# Altium PCB TMS320VC5509A.PcbDoc
Units mil, origin at the board's own origin, x right, y up, seen from the top; angles counter-clockwise.
Board outline 2940 x 2381 mil, 2 copper layers (Top Layer, Bottom Layer); 76 components, 113 nets, 425 pads, 0 vias.
Unrouted connection lines stored in the file: 218.
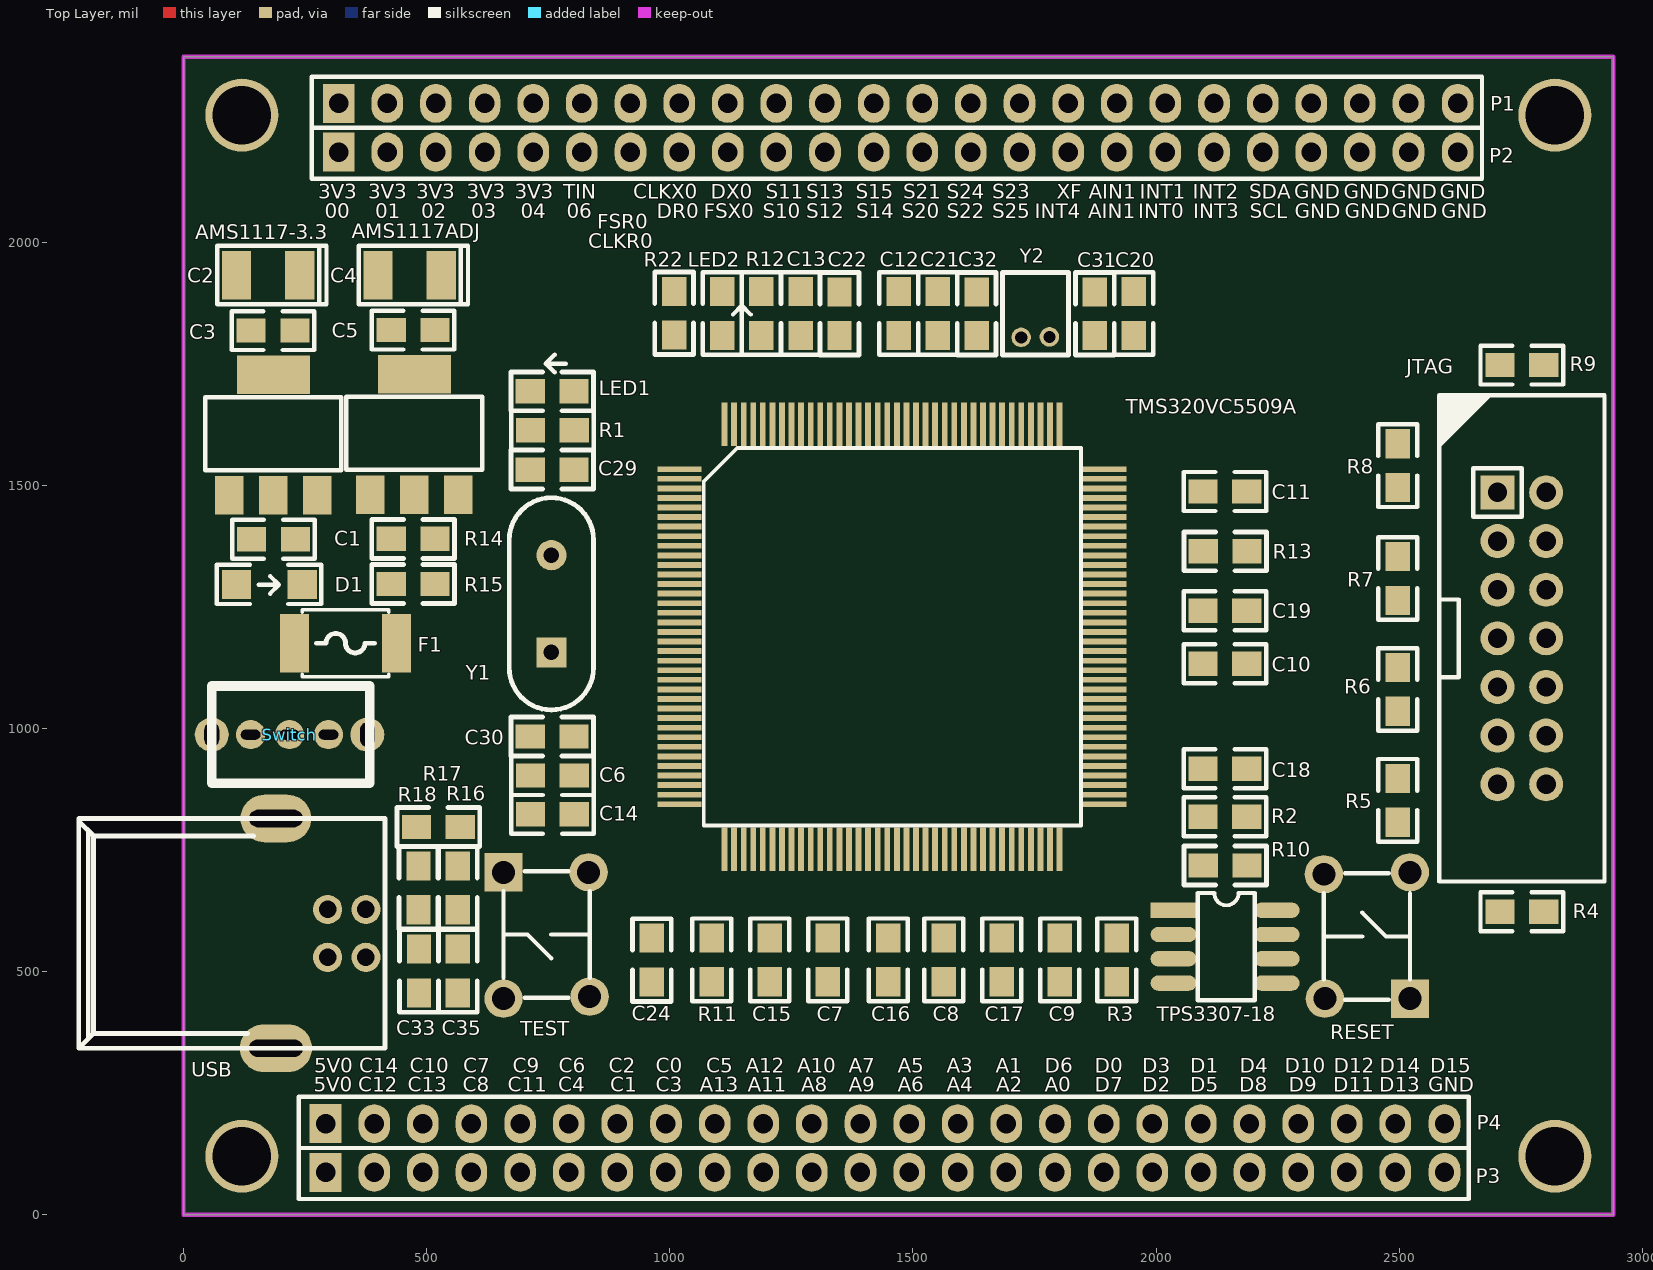
[diagram p0: Top Layer view]
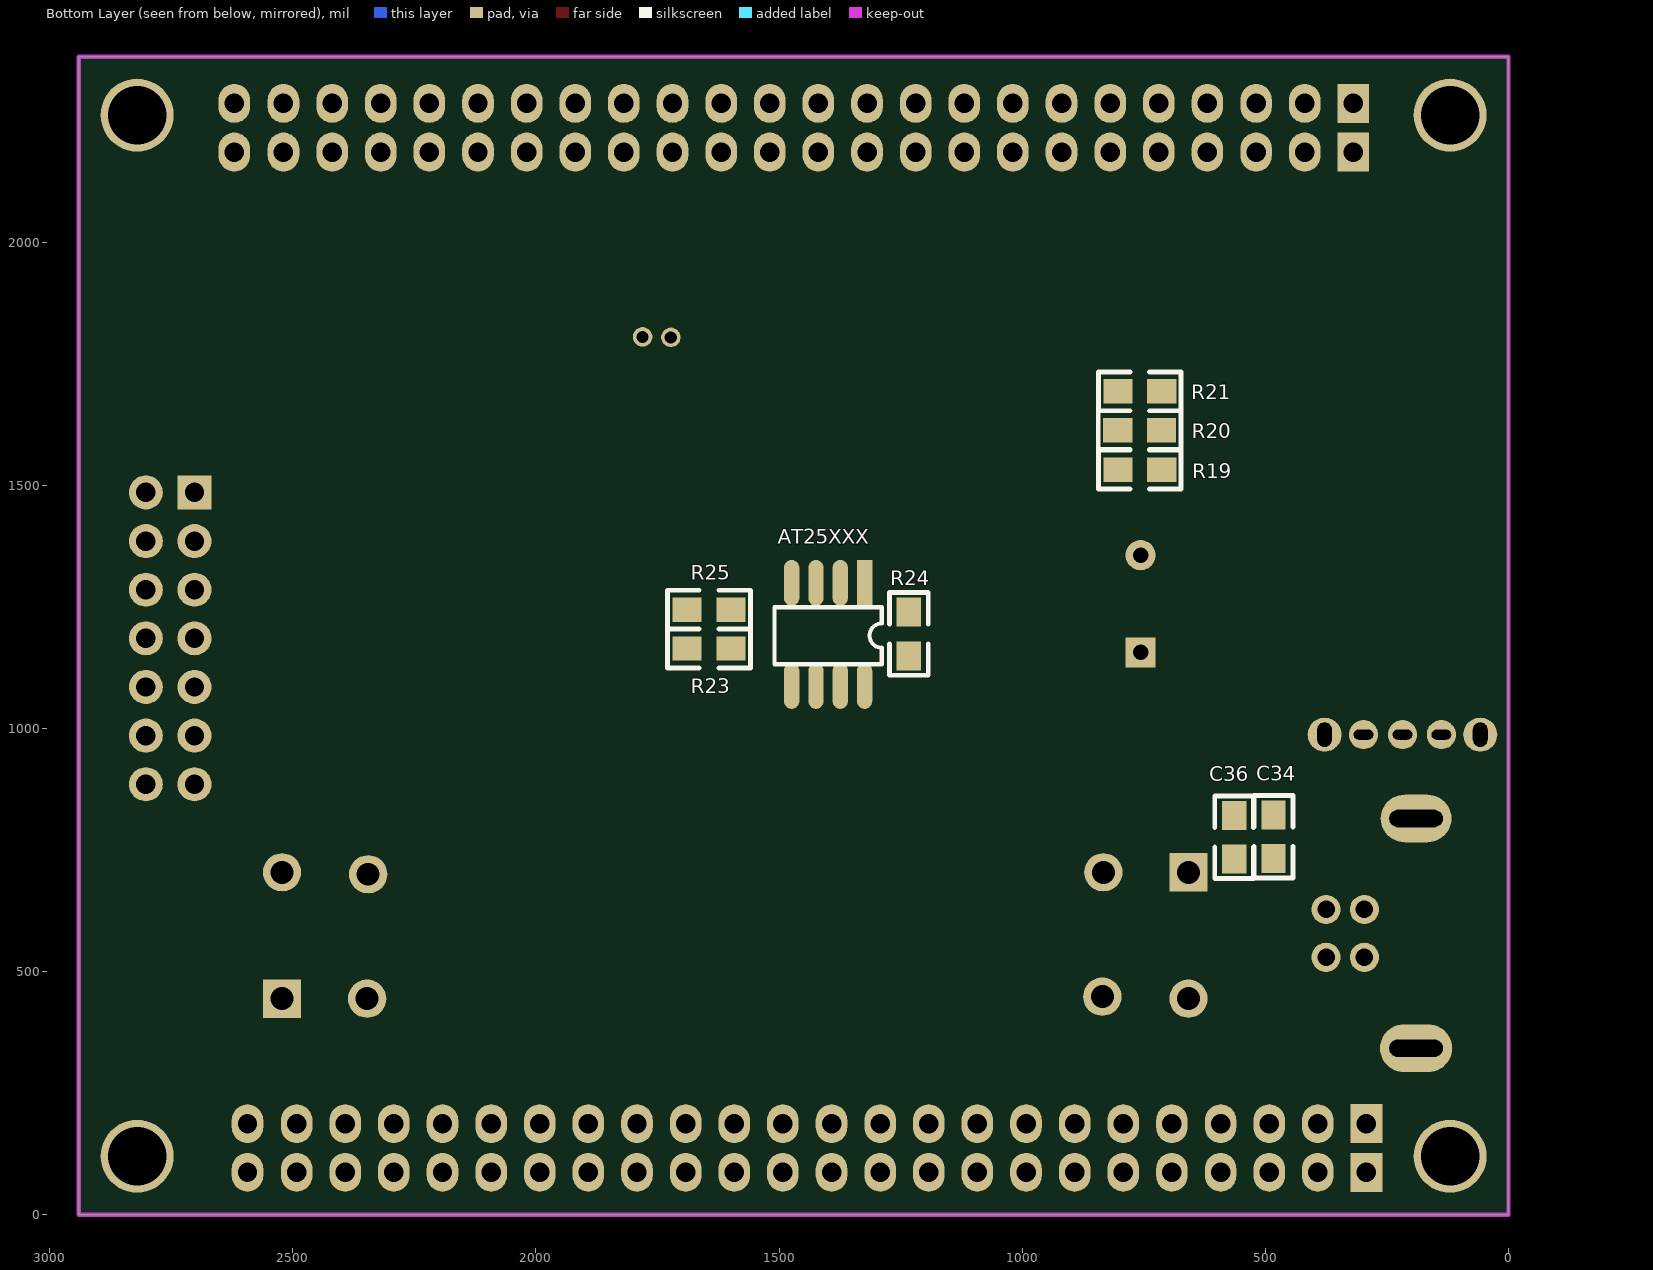
[diagram p1: Bottom Layer view, seen from below]

## Layer stack, top to bottom
Top Layer: signal copper 1.4
Dielectric: dielectric 12.6, FR-4, Dk 4.8
Bottom Layer: signal copper 1.4

## Board outline
0,2381 0,0 2940,0 2940,2381

## Design rules (kind name [scope] priority, off if disabled: settings)
Clearance [All] p1: gap=10
HoleSize [All] p1: absolutevalues=TRUE maxlimit=1000 minlimit=1 maxpercent=80.000 minpercent=20.000
HoleToHoleClearance [All] p1: gap=0 allowstackedmicrovias=TRUE
MinimumSolderMaskSliver [All] p1: minsoldermaskwidth=0
PolygonConnect [All] p1: connectstyle=Direct reliefconductorwidth=30 reliefentries=4 polygonreliefangle="90 Angle"
RoutingVias [All] p1: holewidth=12 width=22 viastyle="Through Hole" minholewidth=12 minwidth=22 maxholewidth=50 maxwidth=100
SilkToSilkClearance [All] p1: silktosilkclearance=0
SilkscreenOverComponentPads [All] p1: minsilkscreentomaskgap=0
SolderMaskExpansion [All] p1: expansion=1
TestPointUsage [All] p1: valid=0 allowmultiple=FALSE
Testpoint [All] p1: side=15 testpointundercomponent=TRUE minsize=40 maxsize=100 preferedsize=60 minholesize=0 maxholesize=40 preferedholesize=32 testpointgrid=1 style=1023 order=0-112345678
Width [All] p1: maxlimit=100 minlimit=10 preferedwidth=10
19 further rules are at their usual default settings.

## Components (designator, comment, footprint, x,y, rotation, side; value= is the part's Value field where it differs from the comment)
AMS1117-3.3 "1117" SOT-223 64,1454 r0 top
AMS1117ADJ "1117" SOT-223 354,1455 r0 top (schematic designator AMS1117-1.8)
AT25XXX "" SOP8 1324,1299 r0 bottom locked (schematic designator TPS3307-18)
C1 "104" 0805 230,1389 r180 top
C2 "10uf" CE3528 239,1932 r180 top
C3 "104" 0805 229,1818 r180 top
C4 "10uF" CE3528 530,1932 r180 top
C5 "104" 0805 517,1819 r180 top
C6 "104" 0805 803.5,903 r180 top
C7 "104" 0805 1324.67,569 r270 top
C8 "104" 0805 1563.33,569 r270 top (schematic designator C9)
C9 "104" 0805 1802,569 r270 top (schematic designator C10)
C10 "104" 0805 2096.5,1133 r0 top (schematic designator C12)
C11 "104" 0805 2096.5,1487 r0 top (schematic designator C13)
C12 "104" 0805 1471,1808 r90 top (schematic designator C15)
C13 "104" 0805 1269,1808 r90 top (schematic designator C16)
C14 "104" 0805 803.5,823 r180 top (schematic designator C18)
C15 "104" 0805 1205.33,569 r270 top (schematic designator C19)
C16 "104" 0805 1449,569 r270 top (schematic designator C20)
C17 "104" 0805 1682.67,569 r270 top (schematic designator C22)
C18 "104" 0805 2096.5,917 r0 top (schematic designator C23)
C19 "104" 0805 2096.5,1242 r0 top (schematic designator C25)
C20 "104" 0805 1954,1808 r90 top (schematic designator C26)
C21 "104" 0805 1551,1898 r270 top (schematic designator C27)
C22 "104" 0805 1349,1897.5 r270 top
C24 "104" 0805 963,568.5 r270 top (schematic designator C88)
C29 "30pF" 0805 713,1532 r0 top
C30 "30pF" 0805 713,983 r0 top
C31 "30pF" 0805 1874,1897.5 r270 top
C32 "30pF" 0805 1631,1897.5 r270 top
C33 "30pF" 0805 484,456 r90 top
C34 "30pF" 0805 483,732 r90 bottom
C35 "30pF" 0805 564,456 r90 top
C36 "30pF" 0805 564,731 r90 bottom
D1 "7.5V" 1206 109,1296 r0 top
F1 "0.5A" F4532 438,1175 r180 top
JTAG "Header 7X2" IDC14A 2702,1485 r270 top locked
LED1 "LED2" 0805 803,1693 r180 top
LED2 "LED2" 0805 1108,1808 r90 top
P1 "SIP24" SIP24 320,2287 r90 top locked
P2 "SIP24" SIP24 320,2187 r90 top locked
P3 "SIP24" SIP24 293,89 r90 top locked
P4 "SIP24" SIP24 293,189 r90 top locked
R1 "2.2k" 0805 713.5,1613 r0 top
R2 "10K" 0805 2096.5,818 r0 top
R3 "10K" 0805 1919,479 r90 top
R4 "10K" 0805 2797,623 r180 top
R5 "10K" 0805 2497,807 r90 top locked
R6 "10K" 0805 2497,1035 r90 top
R7 "10K" 0805 2497,1353 r270 top
R8 "10K" 0805 2497,1495 r90 top
R9 "10K" 0805 2797,1747 r180 top
R10 "10K" 0805 2097,718 r0 top
R11 "10K" 0805 1086,569 r270 top
R12 "2.2K" 0805 1188,1898 r270 top
R13 "0" 0805 2187,1364 r180 top
R14 "200" 0805 517,1389.5 r180 top
R15 "200" 0805 427,1296.93 r0 top
R16 "24" 0805 564,717 r270 top
R17 "1k" 0805 569,797 r180 top
R18 "24" 0805 483,717 r270 top
R19 "10k" 0805 713,1532 r0 bottom
R20 "10k" 0805 713.5,1613 r0 bottom
R21 "10k" 0805 713,1693 r0 bottom
R22 "10k" 0805 1009,1898.5 r270 top
R23 "10K" 0805 1689,1244 r180 bottom
R24 "10K" 0805 1233,1239 r270 bottom
R25 "10K" 0805 1689,1164 r180 bottom
RESET "KEY2" KEY0.2' 2522,444 r90 top locked (schematic designator reset)
Switch "CON3" 5脚船型开关 233,992 r0 top
TEST "KEY2" KEY0.2' 658,704 r270 top locked (schematic designator test)
TMS320VC5509A "TMS320VC5509A" TMS320LV5410 1019,1533 r0 top locked
TPS3307-18 "" SOP8 2036,626 r270 top
USB "CON4" USB2 189,314 r0 top locked
Y1 "12M" CY1#1 756.39,1156 r90 top locked (schematic designator y1)
Y2 "32.768k" CY1#2 1761,1986.5 r270 top

## Footprints (in the part's own frame and the unit in brackets; to place one, negate y for a bottom-side part, rotate by r counter-clockwise, add the part's x,y. Pads: shape width x height; smd on the part's side, far side on the other; paste and mask are expansions set on the pad)
5脚船型开关 [mil]
  round 70 hole 30 slot 50 at 90 deg: 0(-175,-5) 0(145,-5)
  round 60 hole 20 slot 40 at 0 deg: 1(-95,-5) 2(-15,-5) 3(65,-5)
  silkscreen extent -175,-105 150,95
0805 [mil]
  rect 60x50 smd: 1(0,0) 2(90,0)
  silkscreen extent -40,-40 130,40
1206 [mil]
  rect 60x60 smd: 1(0,0) 2(135,0)
  silkscreen extent -40,-40 174,40
CE3528 [mil]
  rect 60x100 smd: 1(0,0) 2(130,0)
  silkscreen extent -55,-60 170,60
CY1#1 [mil]
  rect 62x62 hole 32: 1(0,0)
  round 62 hole 32: 2(200,0)
  silkscreen extent -118,-87 318,87
CY1#2 [mil]
  round 40 hole 25: 1(181.5,19.5) 2(182.5,-38.5)
  silkscreen extent 49,-77 218,59
F4532 [mil]
  rect 60x120 smd mask+3: 1(0,0) 2(210,0)
  silkscreen extent 16,-69 194,69
IDC14A [mil]
  rect 70x70 hole 40: 1(0,0)
  round 70 hole 40: 2(0,100) 3(100,0) 4(100,100) 5(200,0) 6(200,100) 7(300,0) 8(300,100) 9(400,0) 10(400,100) 11(500,0) 12(500,100) 13(600,0) 14(600,100)
  silkscreen extent -200,-120 800,220
KEY0.2' [mm]
  rect 2x2 hole 1.2: 1(0,0)
  round 2 hole 1.2: 2(0,4.445) 3(6.604,0) 4(6.5,4.5)
  silkscreen extent -0.05,0 6.55,4.5
SIP24 [mil]
  rect 80x65 hole 40: 1(-2,1)
  oval 80x65 hole 40: 2(-2,-99) 3(-2,-199) 4(-2,-299) 5(-2,-399) 6(-2,-499) 7(-2,-599) 8(-2,-699) 9(-2,-799) 10(-2,-899) 11(-2,-999) 12(-2,-1099) 13(-2,-1199) 14(-2,-1299) 15(-2,-1399) 16(-2,-1499) 17(-2,-1599) 18(-2,-1699) 19(-2,-1799) 20(-2,-1899) 21(-2,-1999) 22(-2,-2099) 23(-2,-2199) 24(-2,-2300)
  silkscreen extent -57,-2350 53,56
SOP8 [mm]
  rect 0.8x2.4 smd: 1(0,0)
  oval 0.8x2.4 smd: 2(1.27,0) 3(2.54,0) 4(3.81,0) 5(3.81,5.381) 6(2.54,5.381) 7(1.27,5.381) 8(0,5.381)
  silkscreen extent -0.9,1.26 4.7,4.25
SOT-223 [mil]
  rect 59x79 smd: 1(30,25) 2(120.55,25) 3(211.1,25)
  rect 150x79 smd: 4(121,273)
  silkscreen extent -19,77 261,227
TMS320LV5410 [mil]
  rect 90x12 smd: 1(0.93,-0.2) 2(0.93,-19.88) 3(0.93,-39.57) 4(0.93,-59.25) 5(0.93,-78.94) 6(0.93,-98.62) 7(0.93,-118.31) 8(0.93,-137.99) 9(0.93,-157.68) 10(0.93,-177.36) 11(0.93,-197.05) 12(0.93,-216.73) 13(0.93,-236.42) 14(0.93,-256.1) 15(0.93,-275.79) 16(0.93,-295.47) 17(0.93,-315.16) 18(0.93,-334.84) 19(0.93,-354.53) 20(0.93,-374.21) 21(0.93,-393.9) 22(0.93,-413.58) 23(0.93,-433.27) 24(0.93,-452.95) 25(0.93,-472.64) 26(0.93,-492.32) 27(0.93,-512.01) 28(0.93,-531.69) 29(0.93,-551.38) 30(0.93,-571.06) 31(0.93,-590.75) 32(0.93,-610.43) 33(0.93,-630.12) 34(0.93,-649.8) 35(0.93,-669.49) 36(0.93,-689.17) 73(874.94,-689.17) 74(874.94,-669.49) 75(874.94,-649.8) 76(874.94,-630.12) 77(874.94,-610.43) 78(874.94,-590.75) 79(874.94,-571.06) 80(874.94,-551.38) 81(874.94,-531.69) 82(874.94,-512.01) 83(874.94,-492.32) 84(874.94,-472.64) 85(874.94,-452.95) 86(874.94,-433.27) 87(874.94,-413.58) 88(874.94,-393.9) 89(874.94,-374.21) 90(874.94,-354.53) 91(874.94,-334.84) 92(874.94,-315.16) 93(874.94,-295.47) 94(874.94,-275.79) 95(874.94,-256.1) 96(874.94,-236.42) 97(874.94,-216.73) 98(874.94,-197.05) 99(874.94,-177.36) 100(874.94,-157.68) 101(874.94,-137.99) 102(874.94,-118.31) 103(874.94,-98.62) 104(874.94,-78.94) 105(874.94,-59.25) 106(874.94,-39.57) 107(874.94,-19.88) 108(874.94,-0.2)
  rect 12x90 smd: 37(93.45,-781.69) 38(113.13,-781.69) 39(132.82,-781.69) 40(152.5,-781.69) 41(172.19,-781.69) 42(191.87,-781.69) 43(211.56,-781.69) 44(231.24,-781.69) 45(250.93,-781.69) 46(270.61,-781.69) 47(290.3,-781.69) 48(309.98,-781.69) 49(329.67,-781.69) 50(349.35,-781.69) 51(369.04,-781.69) 52(388.72,-781.69) 53(408.41,-781.69) 54(428.09,-781.69) 55(447.78,-781.69) 56(467.46,-781.69) 57(487.15,-781.69) 58(506.83,-781.69) 59(526.52,-781.69) 60(546.2,-781.69) 61(565.89,-781.69) 62(585.57,-781.69) 63(605.26,-781.69) 64(624.94,-781.69) 65(644.63,-781.69) 66(664.31,-781.69) 67(684,-781.69) 68(703.68,-781.69) 69(723.37,-781.69) 70(743.05,-781.69) 71(762.74,-781.69) 72(782.42,-781.69) 109(782.42,92.32) 110(762.74,92.32) 111(743.05,92.32) 112(723.37,92.32) 113(703.68,92.32) 114(684,92.32) 115(664.31,92.32) 116(644.63,92.32) 117(624.94,92.32) 118(605.26,92.32) 119(585.57,92.32) 120(565.89,92.32) 121(546.2,92.32) 122(526.52,92.32) 123(506.83,92.32) 124(487.15,92.32) 125(467.46,92.32) 126(447.78,92.32) 127(428.09,92.32) 128(408.41,92.32) 129(388.72,92.32) 130(369.04,92.32) 131(349.35,92.32) 132(329.67,92.32) 133(309.98,92.32) 134(290.3,92.32) 135(270.61,92.32) 136(250.93,92.32) 137(231.24,92.32) 138(211.56,92.32) 139(191.87,92.32) 140(172.19,92.32) 141(152.5,92.32) 142(132.82,92.32) 143(113.13,92.32) 144(93.45,92.32)
  silkscreen extent 51,-733 827,43
USB2 [mm]
  round 1.524 hole 0.92: 1(4.726,5.465) 2(4.726,7.965) 3(2.726,7.965) 4(2.726,5.465)
  oval 3.7x2.5 hole 0.9 slot 2.794 at 0 deg: 5(0.026,12.715)
  oval 3.762x2.5 hole 0.9 slot 2.794 at 0 deg: 6(0.026,0.715)
  silkscreen extent -10.27,0.72 5.73,12.72

## Part data
AT25XXX TPS3307-18: library part TPS3307-18
C1 C3 C5 C6 C7 C8 C9 C10 C11 C12 C13 C14 C15 C16 C17 C18 C19 C20 C21 C22 C24: library part C3
C2 C4: library part E3
C29 C30 C31 C32 C33 C34 C35 C36: library part C1
D1: library part LED2
F1: library part FUSE1
JTAG: "Header, 7-Pin, Dual row"
R1 R2 R3 R4 R5 R6 R7 R8 R9 R10 R11 R12 R13 R14 R15 R16 R17 R18 R19 R20 R21 R22 R23 R24 R25: library part R3
Y1 Y2: library part CY1

## Free pads (board coordinates)
  round 150 hole 120: 0(2820,120) 1(120,120) 2(120,2261) 3(2820,2261)

## Nets (pads, with @x,y where several pads share a name; then routed paths per layer and width w, separated by ;. In a path a pad name is that pad's centre, name@x,y a point inside that pad or via, vN(x,y) a via of type N, cw(c..) or ccw(c..) an arc to the next point about the centre after c; other vN are vias at no path point)
A0: P3.16 TMS320VC5509A.55
A1: P4.15 TMS320VC5509A.54
A2: P3.15 TMS320VC5509A.52
A3: P4.14 TMS320VC5509A.51
A4: P3.14 TMS320VC5509A.50
A5: P4.13 TMS320VC5509A.48
A6: P3.13 TMS320VC5509A.47
A7: P4.12 TMS320VC5509A.46
A8: P3.11 TMS320VC5509A.44
A9: P3.12 TMS320VC5509A.43
A10: P4.11 TMS320VC5509A.42
A11: P3.10 TMS320VC5509A.40
A12: P4.10 TMS320VC5509A.39
A13: P3.9 TMS320VC5509A.38
AIN0: P2.17 TMS320VC5509A.105
AIN1: P1.17 TMS320VC5509A.106
C0: P4.8 TMS320VC5509A.16
C1: P3.7 TMS320VC5509A.17
C2: P4.7 TMS320VC5509A.19
C3: P3.8 TMS320VC5509A.20
C4: P3.6 TMS320VC5509A.21
C5: P4.9 TMS320VC5509A.22
C6: P4.6 TMS320VC5509A.23
C7: P4.4 TMS320VC5509A.25
C8: P3.4 TMS320VC5509A.26
C9: P4.5 TMS320VC5509A.27
C10: P4.3 TMS320VC5509A.34
C11: P3.5 TMS320VC5509A.28
C12: P3.2 TMS320VC5509A.32
C13: P3.3 TMS320VC5509A.35
C14: P4.2 TMS320VC5509A.31
CLKR0: P2.7 TMS320VC5509A.137
CLKX0: AT25XXX.6 P1.8 TMS320VC5509A.134
D0: P4.17 TMS320VC5509A.57
D1: P4.19 TMS320VC5509A.58
D2: P3.18 TMS320VC5509A.59
D3: P4.18 TMS320VC5509A.61
D4: P4.20 TMS320VC5509A.62
D5: P3.19 TMS320VC5509A.63
D6: P4.16 TMS320VC5509A.65
D7: P3.17 TMS320VC5509A.66
D8: P3.20 TMS320VC5509A.67
D9: P3.21 TMS320VC5509A.69
D10: P4.21 TMS320VC5509A.70
D11: P3.22 TMS320VC5509A.71
D12: P4.22 TMS320VC5509A.74
D13: P3.23 TMS320VC5509A.75
D14: P4.23 TMS320VC5509A.76
D15: P4.24 TMS320VC5509A.77
D+: C33.2 R17.2 R18.2 USB.3
D-: C35.2 R16.2 USB.2
DR0: AT25XXX.2 P2.8 TMS320VC5509A.135
DV5: P3.1 P4.1 Switch.2 USB.1
DX0: AT25XXX.5 P1.9 TMS320VC5509A.131
EMU0: JTAG.13 R5.1 TMS320VC5509A.79
EMU1: JTAG.14 R4.1 TMS320VC5509A.80
FSR0: P1.7 TMS320VC5509A.136
FSX0: P2.9 TMS320VC5509A.133
GND: AMS1117-3.3.1 AT25XXX.4 C1.2 C2.2 C3.2 C4.2 C5.2 C6.2 C7.2 C8.2 C9.2 C10.2 C11.2 C12.2 C13.2 C14.2 C15.2 C16.2 C17.2 C18.2 C19.2 C20.2 C21.1 C22.1 C24.1 C29.1 C30.1 C31.1 C32.1 C33.1 C34.2 C35.1 C36.2 D1.1 JTAG.4 JTAG.8 JTAG.10 JTAG.12 P1.21 P1.22 P1.23 P1.24 P2.21 P2.22 P2.23 P2.24 P3.24 pad.0 pad.1 pad.2 pad.3 R1.2 R9.2 R10.2 R13.1 R15.2 R21.1 R22.1 RESET.3 Switch.0@58,987 TEST.3 TMS320VC5509A.1 TMS320VC5509A.7 TMS320VC5509A.11 TMS320VC5509A.33 TMS320VC5509A.36 TMS320VC5509A.37 TMS320VC5509A.45 TMS320VC5509A.60 TMS320VC5509A.64 TMS320VC5509A.73 TMS320VC5509A.92 TMS320VC5509A.100 TMS320VC5509A.102 TMS320VC5509A.113 TMS320VC5509A.114 TMS320VC5509A.115 TMS320VC5509A.122 TMS320VC5509A.138 TMS320VC5509A.144 TPS3307-18.4 USB.4
GPIO0: P2.1 R19.2 TMS320VC5509A.12
GPIO1: P2.2 R20.2 TMS320VC5509A.10
GPIO2: P2.3 R21.2 TMS320VC5509A.9
GPIO3: P2.4 R22.2 TMS320VC5509A.143
GPIO4: AT25XXX.1 P2.5 R24.1 TMS320VC5509A.142
GPIO6: P2.6 R12.2 TMS320VC5509A.141
GPIO7: P1.5 TMS320VC5509A.6
INT0: P2.18 TMS320VC5509A.93
INT1: P1.18 TMS320VC5509A.94
INT2: P1.19 TMS320VC5509A.96
INT3: P2.19 TMS320VC5509A.97
INT4: P2.16 TMS320VC5509A.99
NetAMS1117-3.3_3: AMS1117-3.3.3 C1.1 D1.2 F1.2
NetAMS1117ADJ_1: AMS1117ADJ.1 R14.2 R15.1
NetAT25XXX_3: AT25XXX.3 R23.2
NetAT25XXX_7: AT25XXX.7 R25.2
NetC24_2: C24.2 R11.2 TEST.4
NetC29_2: C29.2 TMS320VC5509A.13 Y1.2
NetC30_2: C30.2 TMS320VC5509A.14 Y1.1
NetC31_2: C31.2 TMS320VC5509A.111 Y2.1
NetC32_2: C32.2 TMS320VC5509A.112 Y2.2
NetC34_1: C34.1 R18.1 TMS320VC5509A.3
NetC36_1: C36.1 R16.1 TMS320VC5509A.4
NetF1_1: F1.1 Switch.3
NetLED1_2: LED1.2 R1.1
NetLED2_2: LED2.2 R12.1
NetR2_2: R2.2 RESET.4 TPS3307-18.7
NetR3_1: R3.1 R10.1 TPS3307-18.2
NetR13_2: R13.2 TMS320VC5509A.103 TMS320VC5509A.108
NetR17_1: R17.1 TMS320VC5509A.2
RESET: TMS320VC5509A.91 TPS3307-18.5
S10: P2.10 TMS320VC5509A.130
S11: P1.10 TMS320VC5509A.128
S12: P2.11 TMS320VC5509A.129
S13: P1.11 TMS320VC5509A.124
S14: P2.12 TMS320VC5509A.127
S15: P1.12 TMS320VC5509A.125
S20: P2.13 TMS320VC5509A.123
S21: P1.13 TMS320VC5509A.120
S22: P2.14 TMS320VC5509A.121
S23: P1.15 TMS320VC5509A.116
S24: P1.14 TMS320VC5509A.119
S25: P2.15 TMS320VC5509A.117
SCL: P2.20 TMS320VC5509A.90
SDA: P1.20 TMS320VC5509A.89
TCK: JTAG.9 JTAG.11 R6.1 TMS320VC5509A.85
TDI: JTAG.3 R7.1 TMS320VC5509A.82
TDO: JTAG.7 TMS320VC5509A.81
TIN: P1.6 TMS320VC5509A.140
TMS: JTAG.1 R8.1 TMS320VC5509A.86
TRSTN: JTAG.2 R9.1 TMS320VC5509A.84
VDD1.6: AMS1117ADJ.4 C4.1 C5.1 C14.1 C15.1 C16.1 C17.1 C18.1 C19.1 C20.1 C21.2 C22.2 R14.1 TMS320VC5509A.18 TMS320VC5509A.29 TMS320VC5509A.30 TMS320VC5509A.41 TMS320VC5509A.53 TMS320VC5509A.68 TMS320VC5509A.78 TMS320VC5509A.83 TMS320VC5509A.87 TMS320VC5509A.95 TMS320VC5509A.109 TMS320VC5509A.110 TMS320VC5509A.118 TMS320VC5509A.132 TPS3307-18.3
VDD3.3: AMS1117-3.3.4 AMS1117ADJ.3 AT25XXX.8 C2.1 C3.1 C6.1 C7.1 C8.1 C9.1 C10.1 C11.1 C12.1 C13.1 JTAG.5 LED1.1 LED2.1 P1.1 P1.2 P1.3 P1.4 R2.1 R3.2 R4.2 R5.2 R6.2 R7.2 R8.2 R11.1 R19.1 R20.1 R23.1 R24.2 R25.1 TMS320VC5509A.5 TMS320VC5509A.8 TMS320VC5509A.24 TMS320VC5509A.49 TMS320VC5509A.56 TMS320VC5509A.72 TMS320VC5509A.88 TMS320VC5509A.98 TMS320VC5509A.104 TMS320VC5509A.107 TMS320VC5509A.126 TMS320VC5509A.139 TPS3307-18.1 TPS3307-18.8
XF: P1.16 TMS320VC5509A.101
pads on no net: AMS1117-3.3.2 AMS1117ADJ.2 JTAG.6 RESET.1 RESET.2 Switch.0@378,987 Switch.1 TEST.1 TEST.2 TMS320VC5509A.15 TPS3307-18.6 USB.5 USB.6

## Keep-outs
Keep-Out Layer:
  the board outline again, w9

## Silkscreen, mask and mechanical layers (free items; w line width, h text height)
Top Overlay:
  lines w9: 155,1295 196,1295 ; 178,1277 196,1295 ; 178,1313 196,1295 ; 763,1732 745,1750 ; 763,1768 745,1750 ; 786,1750 745,1750 ; 1130,1851 1148,1869 ; 1148,1828 1148,1869 ; 1166,1851 1148,1869
  text "3V3" at 277.5,2089 h30
  text "3V3" at 379.5,2089 h30
  text "3V3" at 478.5,2089 h30
  text "3V3" at 582.5,2089 h30
  text "3V3" at 681.5,2089 h30
  text "TIN" at 780.5,2089 h30
  text "CLKX0" at 925,2089 h30
  text "DX0" at 1084,2089 h30
  text "S11" at 1197,2089 h30
  text "S13" at 1281,2089 h30
  text "S15" at 1382.5,2089 h30
  text "S21" at 1479.5,2089 h30
  text "S24" at 1569.5,2089 h30
  text "S23" at 1663.5,2089 h30
  text "XF" at 1795.5,2089 h30
  text "AIN1" at 1861,2089 h30
  text "INT1" at 1966,2089 h30
  text "INT2" at 2075,2089 h30
  text "SDA" at 2191,2089 h30
  text "GND" at 2284,2089 h30
  text "GND" at 2386,2089 h30
  text "GND" at 2483,2089 h30
  text "GND" at 2583,2089 h30
  text "00" at 290.5,2049 h30
  text "01" at 394.5,2049 h30
  text "02" at 488.5,2049 h30
  text "03" at 591.5,2049 h30
  text "04" at 693.5,2049 h30
  text "06" at 788.5,2049 h30
  text "DR0" at 973,2049 h30
  text "FSX0" at 1070,2049 h30
  text "S10" at 1191.5,2049 h30
  text "S12" at 1281,2049 h30
  text "S14" at 1383.5,2049 h30
  text "S20" at 1476.5,2049 h30
  text "S22" at 1569.5,2049 h30
  text "S25" at 1662.5,2049 h30
  text "INT4" at 1750,2049 h30
  text "AIN1" at 1860.48,2049 h30
  text "INT0" at 1963,2049 h30
  text "INT3" at 2076,2049 h30
  text "SCL" at 2192,2049 h30
  text "GND" at 2284.97,2049 h30
  text "GND" at 2388,2049 h30
  text "GND" at 2484,2049 h30
  text "GND" at 2586,2049 h30
  text "FSR0" at 851,2027 h30
  text "CLKR0" at 832,1987 h30
  text "5V0" at 269,292 h30
  text "C14" at 361.5,292 h30
  text "C10" at 465.5,292 h30
  text "C7" at 575.5,292 h30
  text "C9" at 676.5,292 h30
  text "C6" at 771.5,292 h30
  text "C2" at 874.5,292 h30
  text "C0" at 971.5,292 h30
  text "C5" at 1075,292 h30
  text "A12" at 1156,292 h30
  text "A10" at 1262,292 h30
  text "A7" at 1368,292 h30
  text "A5" at 1468.5,292 h30
  text "A3" at 1569.5,292 h30
  text "A1" at 1670.5,292 h30
  text "D6" at 1770.5,292 h30
  text "D0" at 1874,292 h30
  text "D3" at 1971,292 h30
  text "D1" at 2070,292 h30
  text "D4" at 2172,292 h30
  text "D10" at 2264,292 h30
  text "D12" at 2365,292 h30
  text "D14" at 2460,292 h30
  text "D15" at 2564,292 h30
  text "5V0" at 268,253 h30
  text "C12" at 359.5,253 h30
  text "C13" at 461.5,253 h30
  text "C8" at 574,253 h30
  text "C11" at 666.5,253 h30
  text "C4" at 770.5,253 h30
  text "C1" at 877.5,253 h30
  text "C3" at 971.5,253 h30
  text "A13" at 1061,253 h30
  text "A11" at 1160,253 h30
  text "A8" at 1270.5,253 h30
  text "A9" at 1368,253 h30
  text "A6" at 1468.5,253 h30
  text "A4" at 1569.5,253 h30
  text "A2" at 1671.5,253 h30
  text "A0" at 1770.5,253 h30
  text "D7" at 1874,253 h30
  text "D2" at 1971.48,253 h30
  text "D5" at 2070,253 h30
  text "D8" at 2171,253 h30
  text "D9" at 2273,253 h30
  text "D11" at 2363.97,253 h30
  text "D13" at 2459,253 h30
  text "GND" at 2560,253 h30